# Altium PCB PCB1.PcbDoc
Units mm, origin at the board's own origin, x right, y up, seen from the top; angles counter-clockwise.
Board outline 56.03 x 51.59 mm, 2 copper layers (Top Layer, Bottom Layer); 22 components, 15 nets, 81 pads, 6 vias.
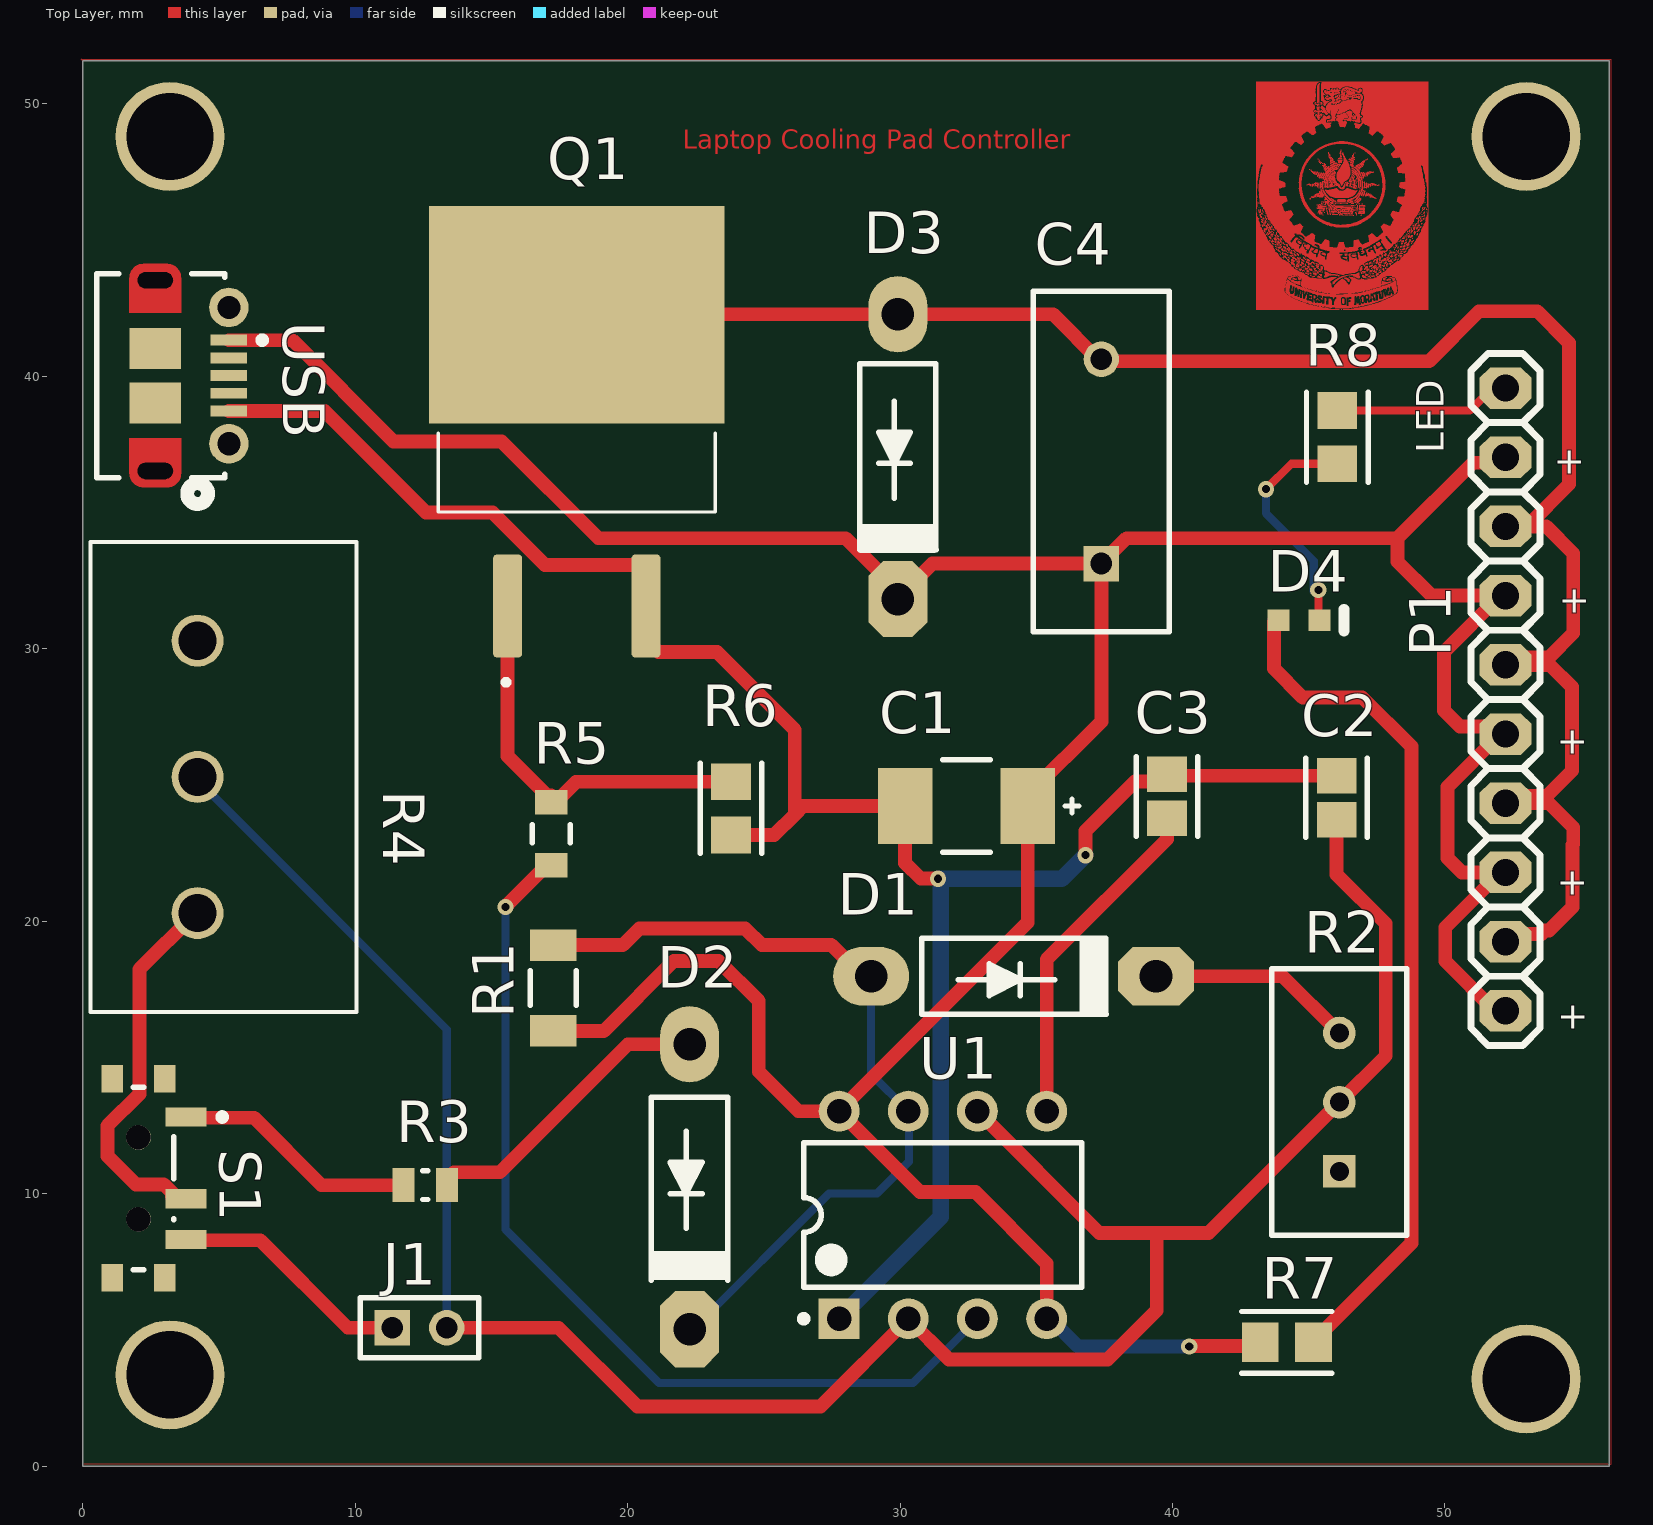
[diagram p0: Top Layer view]
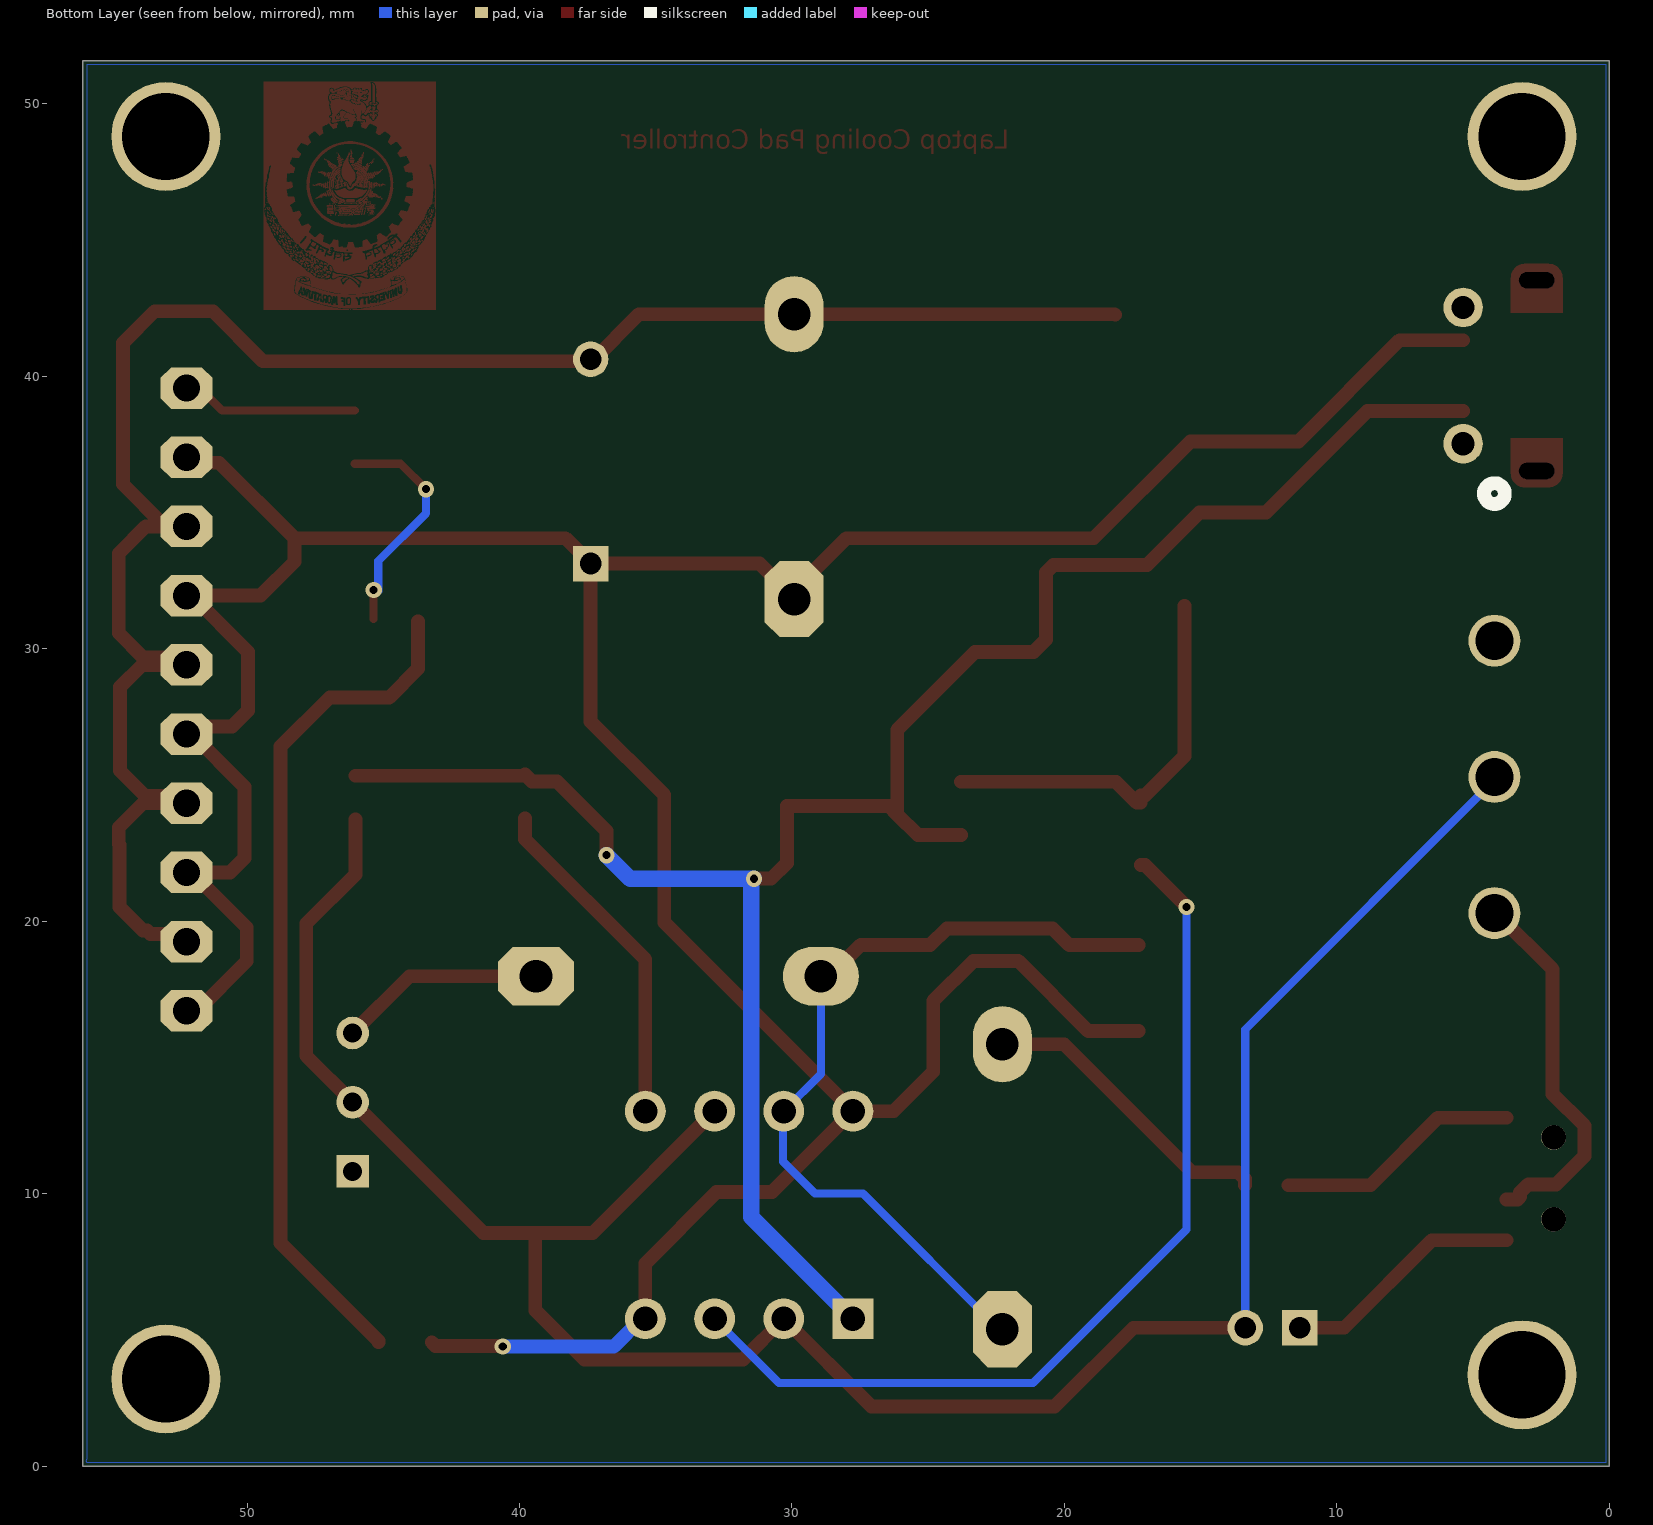
[diagram p1: Bottom Layer view, seen from below]
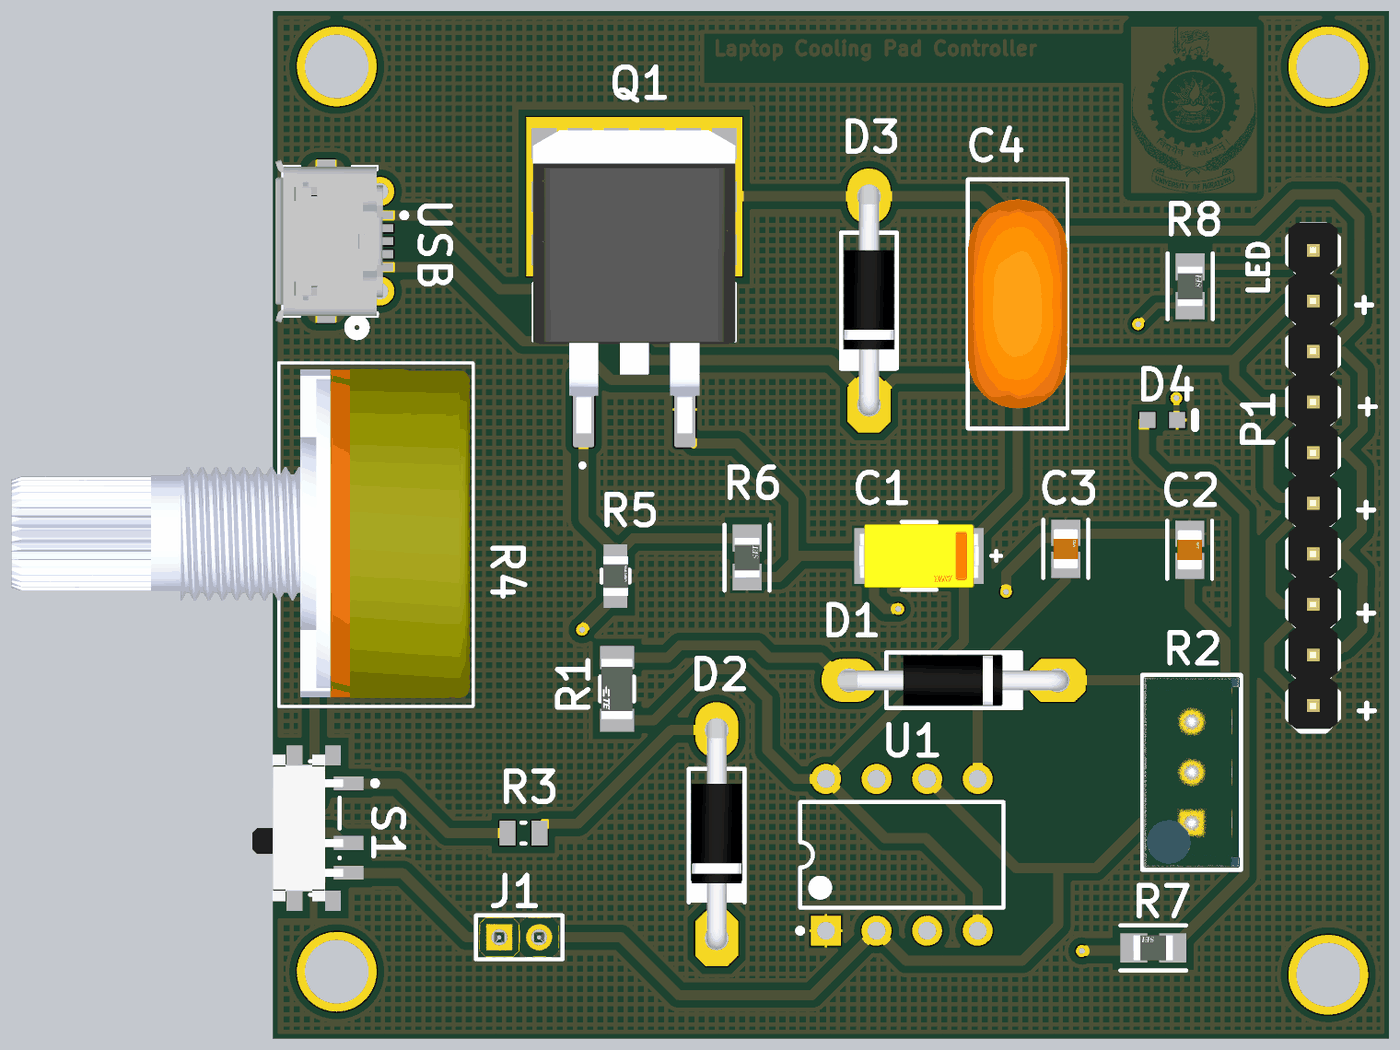
[diagram p2: 3D render of the assembled board from above, using the file's embedded part models]

## Layer stack, top to bottom
Top Solder: solder mask 0.0102, Solder Resist, Dk 3.5
Top Layer: signal copper 0.0356
Dielectric 1: dielectric 0.32, FR-4, Dk 4.8
Bottom Layer: signal copper 0.0356
Bottom Solder: solder mask 0.0102, Solder Resist, Dk 3.5

## Board outline
0,0 56.032,0 56.032,51.587 0,51.587

## Design rules (kind name [scope] priority, off if disabled: settings)
BoardOutlineClearance [All] p1: gap=0.2 ignorepadtopadclearanceinfootprint=FALSE
Clearance [All] p1: gap=0.381 ignorepadtopadclearanceinfootprint=TRUE except(0.127: Arc-SMDPad Arc-THPad Track-SMDPad Track-THPad)
ComponentClearance [All] p1: gap=0.127 collisioncheckmode=3 verticalgap=0.127 showdistances=TRUE
DiffPairsRouting [All] p1: maxlimit=0.254 minlimit=0.127 mostfreqgap=0.127 toplayer_minwidth=0.127 toplayer_maxwidth=25.4 toplayer_prefwidth=0.127 bottomlayer_minwidth=0.127 bottomlayer_maxwidth=25.4 bottomlayer_prefwidth=0.127 maxuncoupledlength=12.7
Height [All] p1: minheight=0 maxheight=1816.048 prefheight=12.7
HoleSize [All] p1: absolutevalues=TRUE maxlimit=6.3 minlimit=0.3 maxpercent=80.000 minpercent=20.000
HoleToHoleClearance [All] p1: gap=0.25 allowstackedmicrovias=FALSE
MinimumAnnularRing [All] p1: minimumring=0.076
MinimumSolderMaskSliver [All] p1: minsoldermaskwidth=0
PlaneClearance [All] p1: clearance=0.127
PlaneConnect PlaneConnectPowerPads [InPadClass('PowerPads')] p1: planeconnectstyle=Direct reliefexpansion=0.508 reliefentries=4 reliefconductorwidth=0.254 reliefairgap=0.254
PlaneConnect [All] p2: pad.planeconnectstyle=Relief pad.reliefexpansion=0.3 pad.reliefentries=4 pad.reliefconductorwidth=0.127 pad.reliefairgap=0.127 via.planeconnectstyle=Direct via.reliefexpansion=0.3 via.reliefentries=4 via.reliefconductorwidth=0.127 via.reliefairgap=0.127
PolygonConnect PolygonConnectPowerPads [All vs (InPadClass('PowerPads'))] p1: connectstyle=Direct reliefconductorwidth=0.254 reliefentries=4 polygonreliefangle="90 Angle" airgapwidth=0.254
PolygonConnect [All] p2: thpad.connectstyle=Relief thpad.reliefconductorwidth=0.127 thpad.reliefentries=4 thpad.polygonreliefangle="90 Angle" thpad.airgapwidth=0.127 smdpad.connectstyle=Relief smdpad.reliefconductorwidth=0.127 smdpad.reliefentries=4 smdpad.polygonreliefangle="90 Angle" smdpad.airgapwidth=0.127 via.connectstyle=Direct via.reliefconductorwidth=0.127 via.reliefentries=4 via.polygonreliefangle="90 Angle" via.airgapwidth=0.127
RoutingVias [All] p1: holewidth=0.3 width=0.6 viastyle="Through Hole" minholewidth=0.3 minwidth=0.6 maxholewidth=0.6 maxwidth=6.6
SilkToSilkClearance [All] p1: silktosilkclearance=0
SilkToSolderMaskClearance [IsPad] p1: minsilkscreentomaskgap=0.127 clearancetoexposedcopper=TRUE
SolderMaskExpansion [All] p1: expansion=0.075 istentingtop=FALSE
Width [All] p1: maxlimit=25.4 minlimit=0.127 preferedwidth=0.127 minimp=50.000000 maximp=50.000000 favimp=50.000000
20 further rules are at their usual default settings.

## Components (designator, comment, footprint, x,y, rotation, side; value= is the part's Value field where it differs from the comment)
C1 "100uF" FP-TAJW-MFG 32.436,24.232 r0 top
C2 "10nF" FP-0805-L_2_01_0_2-W_1_25-IPC_B 46.025,24.536 r90 top
C3 "10nF" FP-0805-L_2_01_0_2-W_1_25-IPC_B 39.802,24.587 r90 top
C4 "47nF" FP-VY2472M49Y5UG63V7-MFG 37.389,36.881 r90 top
D1 "1N4007" My_DO41 34.138,17.882 r180 top
D2 "1N4007" My_DO41 22.174,10.287 r90 top
D3 "1N4007" My_DO41 29.82,37.084 r90 top
D4 "HSMS-C190" AVAG-HSMX-C190_V 44.645,31.052 r0 top
J1 "thermistor pin header" FP-M22-2510205-MFG 12.36,5.08 r0 top
P1 "Header 10" MY_MA10-1 52.222,28.143 r90 top
Q1 "IRFZ44NSTRRPBF" DPAK254P1524X483-3N 18.136,37.973 r90 top
R1 "1k" FP-RP732B-MFG 17.272,17.551 r270 top value=1.0KΩ
R2 "100k trimmer" FP-3296W-MFG 46.121,13.36 r0 top
R3 "2k" RESC2013X60X35LL10T20 12.573,10.312 r0 top
R4 "P160KN-0FC20B5K" POT_P160KN_F20_TTE 4.216,30.298 r270 top
R5 "1k" FP-RC2012-MFG 17.196,23.216 r90 top
R6 "10k" FP-RMCF0805-IPC_A 23.8,24.145 r90 top
R7 "10k" FP-RMCF0805-IPC_A 44.196,4.547 r180 top
R8 "10k" FP-RMCF0805-IPC_A 46.05,37.77 r90 top
S1 "PCM12SMTR" FP-PCM12SMTR-MFG 1.295,10.566 r270 top
U1 "NE555P" P0008A 31.572,9.22 r90 top
USB "105017-0001" USB-MICRO-B_V 4.013,40.03 r270 top

## Footprints (in the part's own frame and the unit in brackets; to place one, negate y for a bottom-side part, rotate by r counter-clockwise, add the part's x,y. Pads: shape width x height; smd on the part's side, far side on the other; paste and mask are expansions set on the pad)
AVAG-HSMX-C190_V [mm] "SMD, 2-Leads, Body 1.6x0.8mm, Height 0.9mm"
  rect 0.8x0.8 smd: 1(-0.75,0) 2(0.75,0)
  silkscreen extent 1.65,-0.4 1.65,0.4, body extent -0.8,-0.4 0.8,0.4, height 0.9
DPAK254P1524X483-3N [mm]
  rrect25% 3.78x1.06 smd: 1(-6.4,2.54) 3(-6.4,-2.54)
  rect 8x10.84 smd paste-6: 2(4.29,0)
  silkscreen extent -9.3,-5.08 -0.05,5.08, body extent -7.62,-5.08 7.62,5.08, height 4.83
FP-0805-L_2_01_0_2-W_1_25-IPC_B [mm]
  rect 1.305x1.456 smd paste+0 mask+0: 1(-0.806,0) 2(0.806,0)
  silkscreen extent -1.46,-1.13 1.46,1.13, body extent -1.71,-0.98 1.71,0.98, height 0.25
FP-3296W-MFG [mm]
  rect 1.2x1.2 hole 0.7 paste-1000 mask+0: 1(0.005,-2.54)
  round 1.2 hole 0.7 paste-1000 mask+0: 2(0.005,0) 3(0.005,2.54)
  silkscreen extent -2.48,-4.89 2.48,4.89, body extent -2.58,-4.99 2.58,4.99, height 0.25
FP-M22-2510205-MFG [mm]
  rect 1.3x1.3 hole 0.8 paste-1000 mask+0: 1(-1,0)
  round 1.3 hole 0.8 paste-1000 mask+0: 2(1,0)
  silkscreen extent -2.17,-1.1 2.17,1.1, body extent -2.27,-1.2 2.27,1.2, height 0.25
FP-PCM12SMTR-MFG [mm]
  rect 0.7x1.5 smd paste+0 mask+0: 1(-2.25,2.5) 2(0.75,2.5) 3(2.25,2.5)
  rect 1x0.8 smd paste+0 mask+0: 4(-3.65,1.715) 5(3.65,1.715) 6(-3.65,-0.215) 7(3.65,-0.215)
  round 0.9 hole 0.9 unplated paste-1000 mask+0: ""(-1.5,0.75) ""(1.5,0.75)
  silkscreen extent -3.35,0.56 3.35,3.95, body extent -4.25,-2.15 4.25,3.35, height 0.25
FP-RC2012-MFG [mm]
  rect 0.9x1.2 smd paste+0 mask+0: 1(-1.15,0) 2(1.15,0)
  silkscreen extent -0.33,-0.7 0.33,0.7, body extent -1.7,-0.8 1.7,0.8, height 0.25
FP-RMCF0805-IPC_A [mm]
  rect 1.355x1.462 smd paste+0 mask+0: 1(-0.976,0) 2(0.976,0)
  silkscreen extent -1.65,-1.13 1.65,1.13, body extent -2.15,-1.23 2.15,1.23, height 0.25
FP-RP732B-MFG [mm]
  rect 1.15x1.7 smd paste+0 mask+0: 1(-1.575,0) 2(1.575,0)
  silkscreen extent -0.63,-0.85 0.63,0.85, body extent -2.25,-0.95 2.25,0.95, height 0.25
FP-TAJW-MFG [mm]
  rect 2x2.8 smd paste+0 mask+0: 1(-2.25,0) 2(2.25,0)
  silkscreen extent -0.87,-1.7 4.13,1.7, body extent -3.35,-1.8 3.35,1.8, height 0.25
FP-VY2472M49Y5UG63V7-MFG [mm]
  rect 1.3x1.3 hole 0.8 paste-1000 mask+0: 1(-3.75,0)
  round 1.3 hole 0.8 paste-1000 mask+0: 2(3.75,0)
  silkscreen extent -6.25,-2.5 6.25,2.5, body extent -6.35,-2.6 6.35,2.6, height 0.25
My_DO41 [mil]
  oval 110x85 hole 47.24: A(204.71,-4)
  oct 110x85 hole 47.24: K(-207.1,-4)
  silkscreen extent -138,-59 132,51, body extent -228,-53 228,45, height 104
MY_MA10-1 [mm]
  oct 1.524x1.905 hole 1: 1(-11.43,0) 2(-8.89,0) 3(-6.35,0) 4(-3.81,0) 5(-1.27,0) 6(1.27,0) 7(3.81,0) 8(6.35,0) 9(8.89,0) 10(11.43,0)
  silkscreen extent -12.7,-1.27 12.7,1.27, body extent -12.6,-1.25 12.8,1.25, height 8.23
P0008A [mm] "DIP, 8-Leads, Body 10.15x6.6mm, Pitch 2.54mm"
  rect 1.5x1.5 hole 0.9: 1(-3.81,3.81)
  round 1.5 hole 0.9: 2(-3.81,1.27) 3(-3.81,-1.27) 4(-3.81,-3.81) 5(3.81,-3.81) 6(3.81,-1.27) 7(3.81,1.27) 8(3.81,3.81)
  silkscreen extent -3.93,-5.1 2.65,5.23, body extent -3.95,-5.07 3.95,5.07, height 5.08
POT_P160KN_F20_TTE [mil]
  round 75 / inner round 60 / far side round 75 hole 55 paste-37.5 mask+0: 1(0,0) 2(196.85,0) 3(393.7,0)
  silkscreen extent -228,-155 536,229, body extent -130,-683 520,223, height 825
RESC2013X60X35LL10T20 [mm] "Chip Resistor, 2-Leads, Body 2.00x1.25mm, IPC High Density"
  rect 0.8x1.25 smd: 1(-0.8,0) 2(0.8,0)
  silkscreen extent -0.1,-0.53 0.1,0.53, body extent -1.05,-0.67 1.05,0.67, height 0.6
USB-MICRO-B_V [mm] "USB, MICRO B, Body 7.491x4.695 mm, Pitch 0.65 mm"
  rect 0.4x1.35 smd: 1(-1.3,1.35) 2(-0.65,1.35) 3(0,1.35) 4(0.65,1.35) 5(1.3,1.35)
  round 1.45 hole 0.85: 6(-2.5,1.35) 7(2.5,1.35)
  rrect50% 0x0 hole 0.6 slot 1.3 at 90 deg: 8(-3.5,-1.35) 11(3.5,-1.35)
  rect 1.5x1.9 smd: 9(-1,-1.35) 10(1,-1.35)
  Top Layer circle w0.5: c3.6,-0.9 r0.25
  Top Layer circle w0.5: c3.6,-1.8 r0.25
  Top Layer circle w0.5: c-3.6,-0.9 r0.25
  Top Layer circle w0.5: c-3.6,-1.8 r0.25
  Top Layer region: -2.3,-2.3 -2.3,-0.4 -3.6,-0.4 -3.6,-2.3
  Top Layer region: 2.3,-0.4 2.3,-2.3 3.6,-2.3 3.6,-0.4
  Top Layer region: 3.6,-0.9 3.6,-1.8 4.1,-1.8 4.1,-0.9
  Top Layer region: -3.6,-1.8 -3.6,-0.9 -4.1,-0.9 -4.1,-1.8
  silkscreen extent -3.75,-3.5 3.75,2.7, body extent -4.1,-3.9 4.1,1.5, height 2.67

## Part data
C1: library part CMP-04424-000114-1, "100uF 4V  ±10% 400mΩ 2312  SMD Tantalum Capacitor", Case Code (Imperial)=2412, Case Code (Metric)=6032, Case/Package=Molded, Dielectric Material=Tantalum, ESR (Equivalent Series Resistance)=1.3R, Leakage Current=4uA, Max Operating Temperature=125°C, Min Operating Temperature=-55°C, Package Quantity=1000, Tolerance=10%, Voltage Rating=4V, Capacitance=100uF, Construction=Flat, Depth=3.2mm, Dissipation Factor=6%, Features="General Purpose", Height=1.5mm, Height - Seated (Max)=0.059inch, Lead Free="Lead Free", Length=6mm, Mount="Surface Mount", Number of Pins=2, Packaging="Tape and Reel", Polarity=Polar, Radiation Hardening=No, REACH SVHC="No SVHC", RoHS Compliant=Yes, Series=TAJ, Termination=SMD/SMT, Voltage Rating (DC)=4V, Width=0.126inch
C2 C3: library part CMP-2007-04361-2, "General Purpose Ceramic Capacitor, 0805, 10nF, 5%, X7R, 0.15, 50V", Case Code (Imperial)=0805, Case Code (Metric)=2012, Dielectric=X7R, Dielectric Material=Ceramic, Insulation Resistance=100GR, Max Operating Temperature=125°C, Min Operating Temperature=-55°C, Package Quantity=1, Tolerance=5%, Voltage=50V, Capacitance=10nF, Case/Package=0805, Construction=Flat, Contact Plating=Tin, Depth=1.25mm, Dissipation Factor=2.5%, Height=0.71mm, Lead Free="Lead Free", Length=2.01mm, Mount="Surface Mount", Number of Pins=2, Packaging="Tape and Reel", Radiation Hardening=No, REACH SVHC="No SVHC", RoHS Compliant=Yes, Series=-, Termination=SMD/SMT, Thickness=0.037inch, Voltage Rating=50V, Voltage Rating (DC)=50V, Width=0.049inch
C4: library part CMP-02417-000047-1, "Capacitor Ceramic 4700pF ±20% Y5U BULK RADIAL", Capacitance=4.7nF, Case/Package=Radial, Dielectric=Y5U, Max Operating Temperature=125°C, Min Operating Temperature=-40°C, Package Quantity=1000, Resistor Type=Ceramic, Tolerance=20%, Voltage Rating=300V, Body Diameter=12.5mm, Diameter=12.5mm, Dissipation Factor=2.5%, Height - Seated (Max)=0.65inch, Lead Diameter=0.6mm, Lead Pitch=7.5mm, Lead/Base Style=Kinked, Mount="Through Hole", Packaging=Bulk, REACH SVHC="No SVHC", RoHS Compliant=Yes, Series=VY2, Termination=Radial, Thickness=5mm, Voltage Rating (AC)=300V, Voltage Rating (DC)=300V, Weight=0.040932oz
D1 D2 D3: "1 Amp Diode", ASiD Part Number=1n4007-AS
D4: library part CMP-2000-06427-1, "LED Uni-Color Red, 52 mW, 20 mA, -40 to 85 degC, 2-Pin SMD, RoHS, Tape and Reel", Emitting Color=Red, Forward Current=25mA, Forward Voltage=2.6V, Manufacturer=Avago, Operating Temp Range=-40Cto85C, Operating Temperature Classification=Industrial, Package Description="2-Pin Surface Mount Device, Body 1.6 x 0.8 mm, Height 0.9 mm", Package Reference=HSMX-C190, Package Type=ChipLed, Power Dissipation=52W, Reverse Voltage=5V, Test Current (It)=20mA, Chip Material=GaP, Datasheet URL=http://docs.avagotech.com/docs/AV02-0551EN, Datasheet Version=03/2012, DELETED=Compliant, Dominant Wave Length=626nm, High Brightness=No, Lens Dimensions=1x0.8x0.5mm, Lens Type=ColorlessDiffused, Lum Intensity=10mcd, Luminous Intensity=10mcd, Main Category=ChipLED, Manufacturer URL=http://www.avagotech.com/, Mounting=SurfaceMount, Mounting Technology=SurfaceMount, Number of  Elements=1, Packaging=TapeandReel, Peak Wavelength=630nm, Pin Count=2, Product Depth (mm)=0.8mm, Product Height (mm)=0.8mm, Product Length (mm)=1.6mm, Rad Hardened=No, Shape Type=Rectangular, Type=Uni-Color, Viewing Angle=170deg
J1: library part CMP-15831-000005-1, "CONN HEADER VERT 2POS 2MM", Current Rating=2A, Manufacturer=Harwin, Manufacturer Part Number=M22-2510205, Package=0, Temperature="-40°C to +105°C", Temperature Range High=+105°C, Temperature Range Low=-40°C, Automotive=No, Category=Conn, ComponentLink2Description=Datasheet, ComponentLink2URL=https://cdn.harwin.com/pdfs/C018XX_M22_Series_Connectors.pdf, Conn Gender=Male, Conn Orientation=Vertical, Contact Material=Gold,Nickel, Device Class L1=Connectors, Device Class L2="Headers and Wire Housings", Device Class L3=unset, Digikey Description="CONN HEADER VERT 2POS 2MM", Footprint Url=https://cdn.harwin.com/pdfs/M22-251.pdf, Height=5.45mm, Lead Free=Yes, Mouser Description="Headers & Wire Housings 2 PIN SIL VERTICAL GOLD PIN HEADER", Number Of Contacts=2, Number Of Rows=1, Octopart=https://octopart.com/m22-2510205-harwin-2538221, Pitch=2mm, RoHS=TRUE
P1: "Header, 10-Pin", ASiD Part Number="Header 10-AS"
Q1: "RoHS Compliant", Package="D2PAK Infineon", Availability="In Stock", Check_prices=https://www.snapeda.com/parts/IRFZ44NSTRRPBF/Infineon+Technologies/view-part/?ref=eda, MF="Infineon Technologies", MP=IRFZ44NSTRRPBF, Price=None, Purchase-URL=https://pricing.snapeda.com/search/part/IRFZ44NSTRRPBF/?ref=eda, SnapEDA_Link=https://www.snapeda.com/parts/IRFZ44NSTRRPBF/Infineon+Technologies/view-part/?ref=snap
R1: library part CMP-03211-008960-1, "Res Thin Film 1206 1.0KΩ 0.1% 0.25W 15ppm/°C Molded SMD", Manufacturer="TE Connectivity", Manufacturer Part Number=RP73D2B1K0BTG, Package=RP732B, Power Rating=0.25W, Resistance=1.0KΩ, Temperature="-55°C to 155°C", Temperature Coefficient=15ppm/°C, Temperature Range High=155°C, Temperature Range Low=-55°C, Tolerance=0.1%, Voltage Rating=200V, Automotive=No, Category=Res, ComponentLink2Description=Datasheet, ComponentLink2URL=https://www.te.com/commerce/DocumentDelivery/DDEController?Action=showdoc&DocId=Data+Sheet%7F1773272%7FL%7Fpdf%7FEnglish%7FENG_DS_1773272_L.pdf%7F8-1879255-6, Composition="Thin Film", Device Class L1="Passive Components", Device Class L2=Resistors, Device Class L3="Chip SMD Resistors", Height=0.65mm, Ipc Land Pattern Name=RESC305155X55, Lead Free=Yes, Octopart=https://octopart.com/rp73d2b1k0btg-te+connectivity-42012461, octopart_url=https://octopart.com/rp73d2b1k0btg-te+connectivity-42012461, Packaging="250 cut tape length", RoHS=TRUE, Series=RP73
R2: library part CMP-07234-000043-1, "TRIMMER 50K OHM 0.5W PC PIN TOP", Color=Blue, Insulation Resistance=1GR, Manufacturer Series=3296, Max Operating Temperature=125°C, Max Power Dissipation=500mW, Min Operating Temperature=-55°C, Package Quantity=50, Resistance=50kR, Resistance Law=Linear, Resistance Tolerance=10%, Resistor Type=Cermet, Temperature Coefficient=100ppm/°C, Actuator Orientation=Vertical, Actuator Type=SCREW, Contact Plating=Tin, Depth=4.83mm, Height=0.395inch, Lead Free="Lead Free", Length=9.53mm, Military Standard=Not, Mount=Panel, Number of Pins=3, Number of Terminals/Pins=3, Number of Turns=25, Packaging=Rail/Tube, Power Rating=500mW, Radiation Hardening=No, REACH SVHC="No SVHC", RoHS Compliant=Yes, Series=3296, Taper=Linear, Technology=CERMET, Terminal Finish=Tin, Termination=Pin, Tolerance=10%, Type=Potentiometer, Weight=0.03oz, Width=9.53mm
R3: library part CMP-2001-01475-1, Manufacturer=Yageo, Part Number=RT0805FRE072KL
R4: "No Description Available", Mfr_Name="TT Electronics"
R5: library part CMP-13261-003265-1, "Res Thick Film 0805 1kΩ 1% 0.125W ±100ppm/°C Molded SMD T/R", Case Code (Imperial)=0805, Case Code (Metric)=2012, Max Operating Temperature=155°C, Max Power Dissipation=125mW, Min Operating Temperature=-55°C, Resistance=1kR, Temperature Coefficient=100ppm/°C, Tolerance=1%, Voltage Rating (DC)=150V, Case/Package=0805, Composition="Thick Film", Contact Plating=Tin, Depth=1.25mm, Features="Moisture Resistant", Height=0.024inch, Lead Free="Lead Free", Length=0.079inch, Military Standard=Not, Number of Terminations=2, Packaging="Tape and Reel", Radiation Hardening=No, Width=0.049inch
R6 R7 R8: library part CMP-26527-002663-1, "10kΩ ±5% 0.125W 0805 Thick Film Chip Resistor AEC-Q200 compliant", Case Code (Imperial)=0805, Case Code (Metric)=2012, Max Operating Temperature=155°C, Max Power Dissipation=125mW, Min Operating Temperature=-55°C, Resistance=10kR, Resistor Type="Thick Film", Temperature Coefficient=100ppm/°C, Tolerance=5%, Case/Package=0805, Construction=Rectangular, Contact Plating=Tin, Depth=1.25mm, Features="Automotive AEC-Q200", Height=0.026inch, Lead Free="Lead Free", Length=2mm, Military Standard=Not, Mount="Surface Mount", Number of Terminations=2, Packaging="Tape and Reel", Power Rating=125mW, Radiation Hardening=No, RoHS Compliant=Yes, Series=RMCF, Size Code=0805, Width=0.049inch
S1: library part CMP-2000-06884-2, "SWITCH SLIDE SPDT 300MA 6V", Contact Current Rating=300mA, Contact Resistance=70mR, Insulation Resistance=100mR, Max Operating Temperature=85°C, Max Voltage Rating (DC)=6V, Min Operating Temperature=-20°C, Package Quantity=1, Actuator Length=1.5mm, Actuator Material=Nylon, Actuator Type=Standard, Contact Material="Copper Alloy", Contact Plating=Silver, Current Rating=300mA, Depth=5mm, Lead Free="Lead Free", Length=7.7mm, Max Current Rating=300mA, Mechanical Life=10000Cycles, Mount="Surface Mount", Orientation="Right Angle", Packaging="Tape and Reel", REACH SVHC="No SVHC", Switch Function=On-On, Switch Travel=1.5mm, Termination="Gull Wing", Throw Configuration=SPDT, Voltage Rating (AC)=6V, Voltage Rating (DC)=6V, Width=6.7mm
U1: library part CMP-2000-04954-1, "Precision Timer, 4.5 to 16 V, 0 to 70 degC, 8-Pin DIP, Pb-Free, Tube", Manufacturer=TexasInstruments, Maximum High Level Output Current=-200mA, Maximum Low Level Output Current=200mA, Operating Supply Voltage=5, Package=8PDIP, Package Description="8-Pin Double In-line Package, Body 9.59 x 6.35 mm, Pitch 2.54 mm", Package Reference=P8, Category=Timer, Datasheet URL=http://www.ti.com/general/docs/lit/getliterature.tsp?genericPartNumber=NE555&fileType=pdf, Datasheet Version="Rev. I, 09/2014", Manufacturer URL=http://www.ti.com/, Number of Internal Timers=1, Package URL=http://www.ti.com/lit/ml/mpdi001b/mpdi001b.pdf, Packaging=Rail/Tube, Rad Hard=No, Type=Standard
USB: library part CMP-2000-05827-1, "Micro-USB B Receptacle, Right Angle, Bottom Mount, Surface Mount, with Solder Tabs, -30 to 85 degC, 5-Pin USB, RoHS, Tape and Reel", Manufacturer=Molex, Package Description="5-Leads USB, Micro B, Body 7.5 x 5 mm, Pitch 0.65 mm", Package Reference=MICRO-B, Package Version="Rev. F, 12/2012", Standard Package=1, Voltage - Max=30V, 3D Model=105017-0001.stp, Catalog Drawings=1050170001, Category=Connectors,Interconnects, Circuits=5, Connector Type=USB-microB, Datasheet URL=http://www.molex.com/elqNow/elqRedir.htm?ref=http://www.molex.com/webdocs/datasheets/pdf/en-us/1050170001_IO_CONNECTORS.pdf, Datasheet Version=03/2016, Family=USB,DVI,HDMIConnectors, Featured Product=Micro-USBConnectorsUSBConnectors, Features=Shielded,SolderRetention, Gender=Receptacle, Ingress Protection=-, Manufacturer URL=http://www.molex.com/, Mating Products=WM17145-ND-CABLEMICROUSBBTOSTDA1.0MWM17147-ND-CABLEMICROUSBBTOSTDA2.0MWM17146-ND-CABLEMICROUSBBTOSTDA1.5M, Mounting Technology=SurfaceMount, Mounting Type=BoardCutout,SurfaceMount,RightAngle, Number Of Contacts=5, Online Catalog=Molex-MicroUSB, Other Names=WM1399DKR, Package URL=http://www.molex.com/pdm_docs/sd/1050170001_sd.pdf, Packaging=Digi-Reel®, PCN Assembly/Origin=ResinSupplier21/Oct/2015, RoHS Information=1050170001CertofCompliance, Series=-, Specifications=-

## Free pads (board coordinates)
  round 4 hole 3.2: 2(52.984,48.806) 3(3.2,48.806) 5(3.2,3.353) 5(52.984,3.2)

## Via types
v1: diameter 0.6, hole 0.3, Top Layer to Bottom Layer, 6 vias

## Nets (pads, with @x,y where several pads share a name; then routed paths per layer and width w, separated by ;. In a path a pad name is that pad's centre, name@x,y a point inside that pad or via, vN(x,y) a via of type N, cw(c..) or ccw(c..) an arc to the next point about the centre after c; other vN are vias at no path point)
GND: C1.1 C2.2 C3.2 D4.2 Q1.3 R6.1 R8.1 U1.1 USB.5 | length 83.6
  Top Layer w0.127: D4.2@45.356,31.091 D4.2
  Top Layer w0.3: v1(43.434,35.865) 44.363,36.794 R8.1 ; D4.2@45.356,31.091 v1(45.356,32.159)
  Top Layer w0.508: USB.5 8.869,38.73 12.598,35.001 15.049,35.001 16.973,33.077 20.4,33.077 20.676,32.801 20.676,30.34 21.137,29.879 23.283,29.879 26.137,27.026 26.137,23.927 ; R6.1 25.379,23.169 26.137,23.927 ; v1(31.394,21.565) 30.759,21.565 30.186,22.138 C1.1 26.441,24.232 26.137,23.927 ; v1(36.805,22.428) 36.805,23.317 38.62,25.133 39.541,25.133 C3.2 39.853,25.342 C2.2
  Bottom Layer w0.3: v1(31.394,21.565) 31.452,21.507 31.452,21.295 31.496,21.251 ; v1(43.434,35.865) 43.434,34.976 45.187,33.223 v1@45.187,32.12
  Bottom Layer w0.6: U1.1 31.496,9.144 31.496,21.251 ; v1(31.394,21.565) 35.941,21.565 v1(36.805,22.428)
NetC2_1: C2.1 J1.2 R2.2 R4.2 U1.2 U1.6 | length 85.8
  Top Layer w0.508: J1.2 17.466,5.08 20.361,2.184 27.076,2.184 U1.2 31.801,3.912 37.617,3.912 39.421,5.715 39.421,8.56 ; U1.6 37.313,8.56 39.421,8.56 ; C2.1 46.025,21.717 47.828,19.914 47.828,15.062 R2.2 41.326,8.56 39.421,8.56
  Bottom Layer w0.3: R4.2@4.115,25.273 13.36,16.027 J1.2
NetC3_1: C3.1 U1.5 | length 12.6
  Top Layer w0.508: U1.5 35.382,18.593 39.802,23.012 C3.1
NetC4_2: C4.2 D3.A P1.2 P1.4 P1.6 P1.8 Q1.2 | length 72.1
  Top Layer w0.508: Q1.2 18.156,42.284 D3.A 35.609,42.284 37.338,40.555 49.419,40.555 51.257,42.393 53.391,42.393 54.559,41.224 54.559,36.043 P1.8@53.01,34.493 ; P1.2 52.498,19.529 53.54,19.529 53.67,19.66 53.823,19.66 54.686,20.523 54.686,22.809 54.712,22.835 54.712,23.444 53.823,24.333 P1.4 52.498,24.609 53.743,24.609 54.661,25.527 54.661,28.6 53.848,29.413 P1.6 52.498,29.689 53.819,29.689 54.712,30.582 54.712,33.503 53.721,34.493 P1.8@53.01,34.493 ; P1.8 P1.8@53.01,34.493
NetD1_A: D1.A D2.K R1.1 U1.7 | length 30.6
  Top Layer w0.508: R1.1 19.823,19.126 20.433,19.736 24.317,19.736 24.926,19.126 27.477,19.126 28.62,17.983 D1.A
  Bottom Layer w0.3: D2.K 22.408,5.027 27.389,10.008 29.159,10.008 30.328,11.176 30.328,13.005 U1.7 28.938,14.394 D1.A
NetD1_K: D1.K R2.3 | length 7.6
  Top Layer w0.508: D1.K 44.044,17.983 R2.3
NetD2_A: D2.A R3.2 | length 11.2
  Top Layer w0.508: R3.2 13.373,10.537 13.623,10.787 15.309,10.787 20.008,15.487 D2.A
NetD4_1: D4.1 R7.1 | length 31.3
  Top Layer w0.508: D4.1@43.725,31.013 43.725,29.274 44.78,28.219 46.965,28.219 48.768,26.416 48.768,8.197 45.172,4.6 R7.1
NetJ1_1: J1.1 S1.3 | length 8.9
  Top Layer w0.508: S1.3@3.77,8.291 6.517,8.291 9.728,5.08 J1.1
NetP1_10: P1.10 R8.2 | length 6.5
  Top Layer w0.127: P1.10@51.741,39.573 P1.10
  Top Layer w0.3: R8.2 50.913,38.746 P1.10@51.741,39.573
NetQ1_1: Q1.1 R5.2 R6.2 | length 14.6
  Top Layer w0.508: Q1.1 15.596,26.07 17.046,24.62 R5.2@17.196,24.62 ; R5.2 17.346,24.366 18.101,25.121 R6.2
NetR3_1: R3.1 S1.1 | length 9
  Top Layer w0.508: S1.1@3.77,12.791 6.284,12.791 8.763,10.312 R3.1
NetR4_3: R4.3 S1.2 | length 13.8
  Top Layer w0.508: S1.2@3.77,9.791 3.37,9.791 3.274,9.887 3.274,10.04 2.976,10.338 1.956,10.338 0.914,11.379 0.914,12.497 2.083,13.665 2.083,18.241 R4.3@4.115,20.273
NetR5_1: R5.1 U1.3 | length 34.8
  Top Layer w0.508: v1(15.519,20.523) 15.519,20.539 17.046,22.066 R5.1
  Bottom Layer w0.3: v1(15.519,20.523) 15.519,8.687 21.158,3.048 30.48,3.048 U1.3
VCC: C1.2 C4.1 D3.K P1.1 P1.3 P1.5 P1.7 P1.9 R1.2 R7.2 U1.4 U1.8 USB.1 | length 140.8
  Top Layer w0.508: USB.1 7.692,41.33 11.405,37.617 15.367,37.617 18.923,34.061 28.001,34.061 29.921,32.141 D3.K@29.921,31.865 ; R1.2 19.126,15.976 21.692,18.542 23.343,18.542 24.816,17.069 24.816,14.478 26.264,13.03 U1.8 ; D3.K D3.K@29.921,31.865 ; U1.4 35.382,7.442 32.766,10.058 30.734,10.058 U1.8 ; v1(40.615,4.394) 40.632,4.412 43.085,4.412 R7.2 ; P1.1 51.841,16.713 50.013,18.542 50.013,19.774 P1.3@52.032,21.793 ; P1.3 P1.3@52.032,21.793 ; P1.7 P1.7@52.032,31.953 ; P1.9 52.02,36.831 51.03,36.831 48.26,34.061 ; U1.8 34.686,19.954 C1.2 34.686,24.632 37.389,27.335 37.389,33.055 C4.1 ; D3.K@29.921,31.865 31.187,33.131 C4.1 ; C4.1 38.319,34.061 48.26,34.061 ; 48.26,34.061 48.26,33.198 49.505,31.953 P1.7@52.032,31.953 ; P1.3@52.032,21.793 50.622,21.793 50.089,22.327 50.089,24.93 52.032,26.873 P1.5 51.947,27.149 50.55,27.149 49.962,27.737 49.962,29.883 P1.7@52.032,31.953
  Bottom Layer w0.508: U1.4 35.524,5.41 36.54,4.394 v1(40.615,4.394)
pads on no net: R2.1 R4.1 S1. S1.4 S1.5 S1.6 S1.7 USB.2 USB.3 USB.4 USB.6 USB.7 USB.8 USB.9 USB.10 USB.11

## Polygon pours and split planes (outlines as drawn)
GND on Top Layer "NONET_L01_P000" (hatched 90Degree grid 0.508 track 0.203, remove dead copper, shelved, pour order 0): -0.051,51.638 56.083,51.638 56.083,0.076 56.032,0.025 55.982,0.076 0,0.076 0,51.587
GND on Bottom Layer "NONET_L02_P001" (hatched 90Degree grid 0.508 track 0.203, shelved, pour order 1): 0.102,51.435 55.88,51.435 55.88,0.254 55.931,0.203 55.88,0.152 0.102,0.152

## Other copper
Top Layer:
  drawing of 743 lines, arcs and shapes, not listed
  text "Laptop Cooling Pad Controller" at 22.022,48.362 h0.7

## Silkscreen, mask and mechanical layers (free items; w line width, h text height)
Top Overlay:
  text "LED" at 49.962,37.186 h1 r90
  text "+" at 54,36.435 h1
  text "+" at 54.178,31.329 h1
  text "+" at 54.102,26.148 h1
  text "+" at 54.102,20.966 h1
  text "+" at 54.127,16.064 h1

## Text inside footprints (layer, text, board x,y; h text height)
USB: Mechanical 1 "PCB EDGE" at 1.113,47.23 h0.3 r270